# Altium PCB QuadDeckV2.PcbDoc
Units mm, origin at the board's own origin, x right, y up, seen from the top; angles counter-clockwise.
Board outline 42.2 x 31.8 mm, 4 copper layers (Top Layer, VDD, GND, Bottom Layer), stack 0.604 mm thick; 21 components, 13 nets, 108 pads, 41 vias.
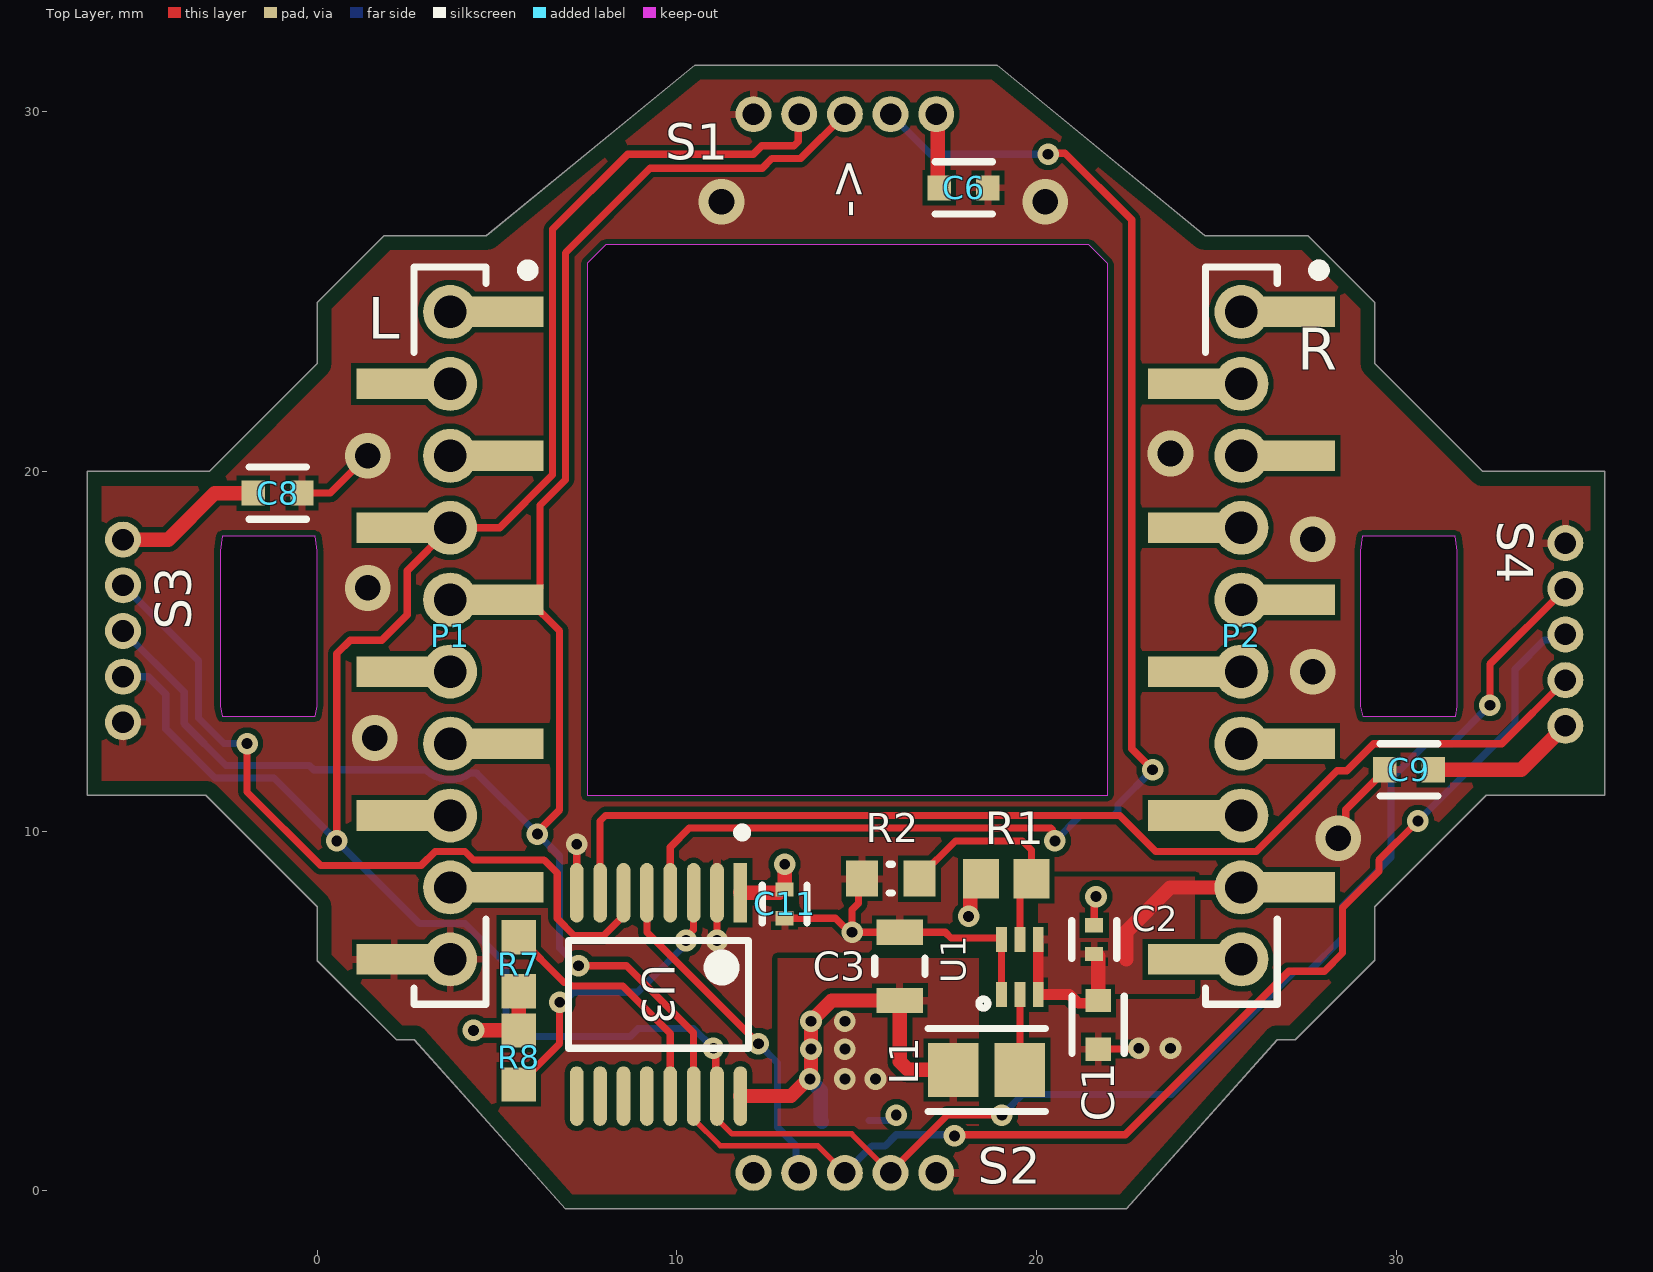
[diagram p0: Top Layer view]
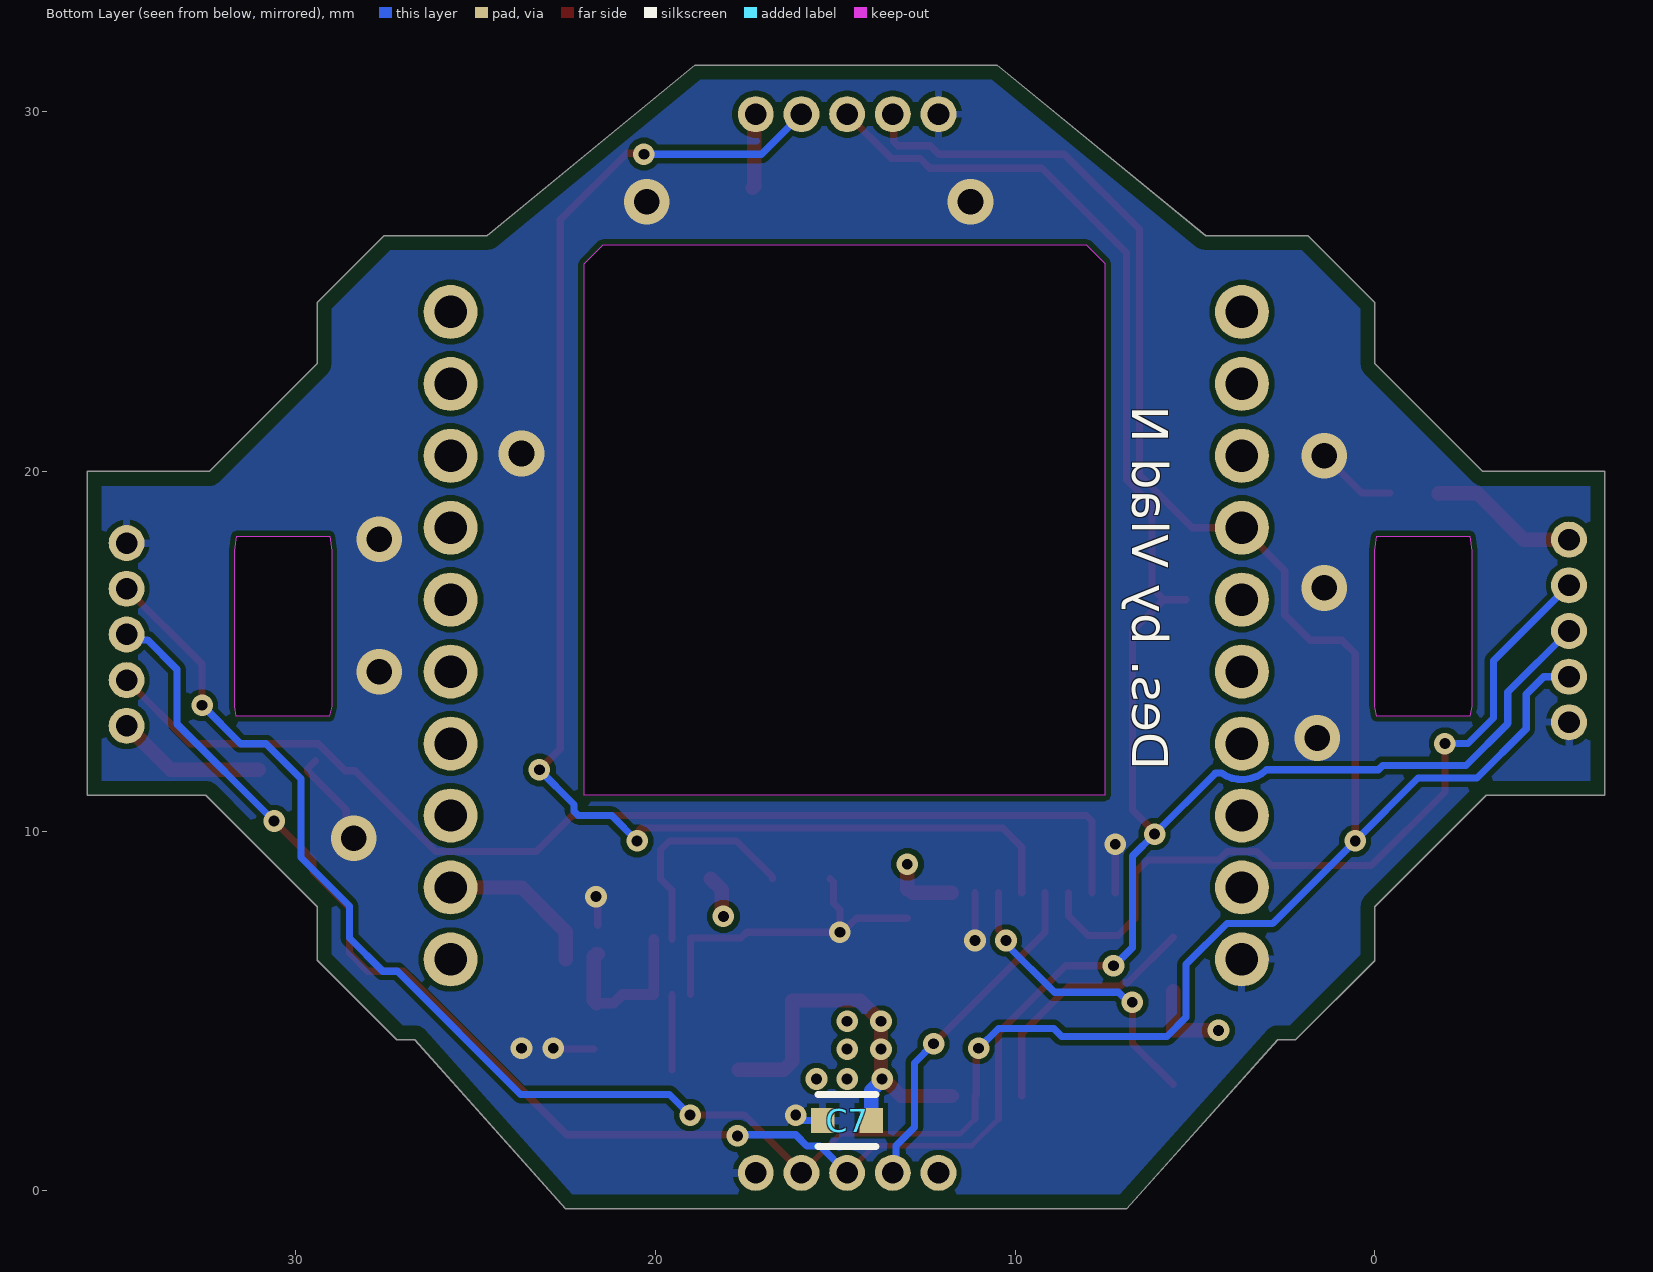
[diagram p1: Bottom Layer view, seen from below]
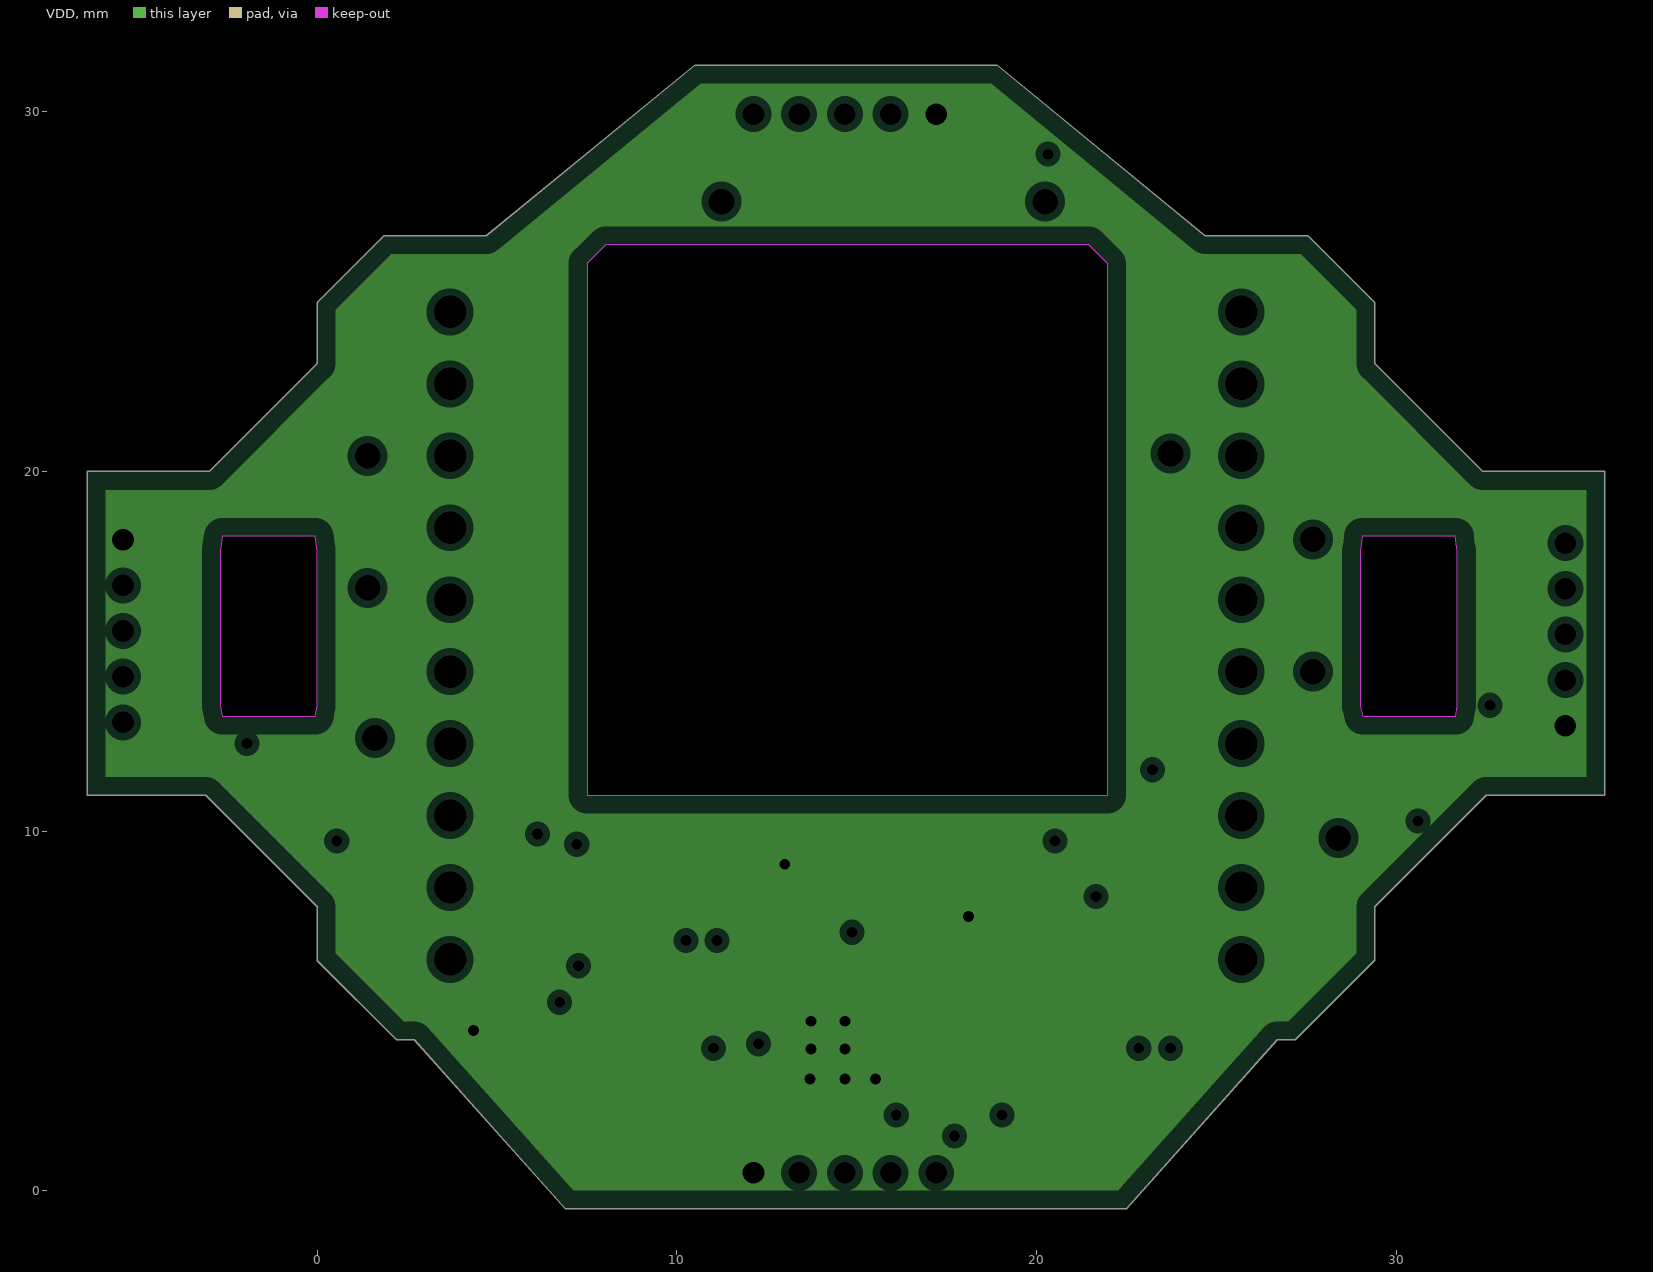
[diagram p2: VDD, clearances drawn from the general rule]
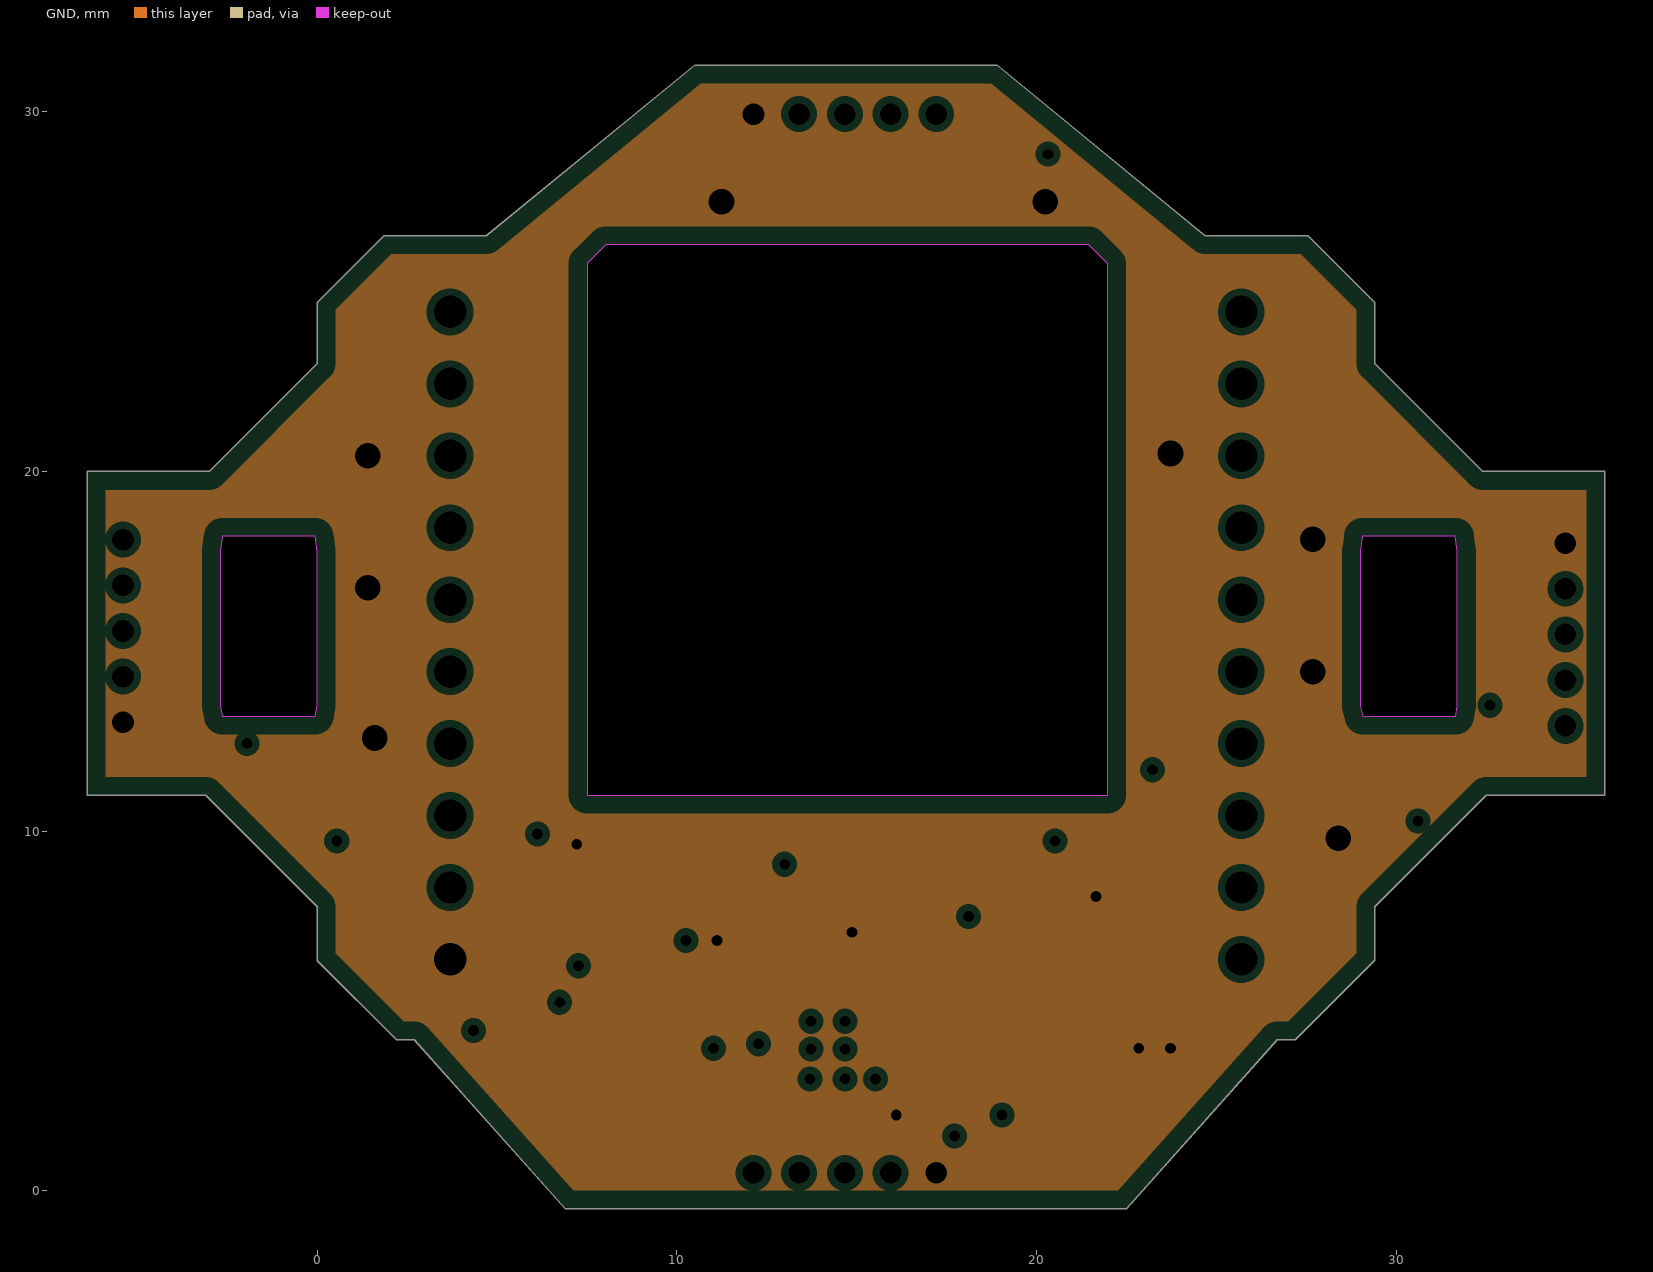
[diagram p3: GND, clearances drawn from the general rule]
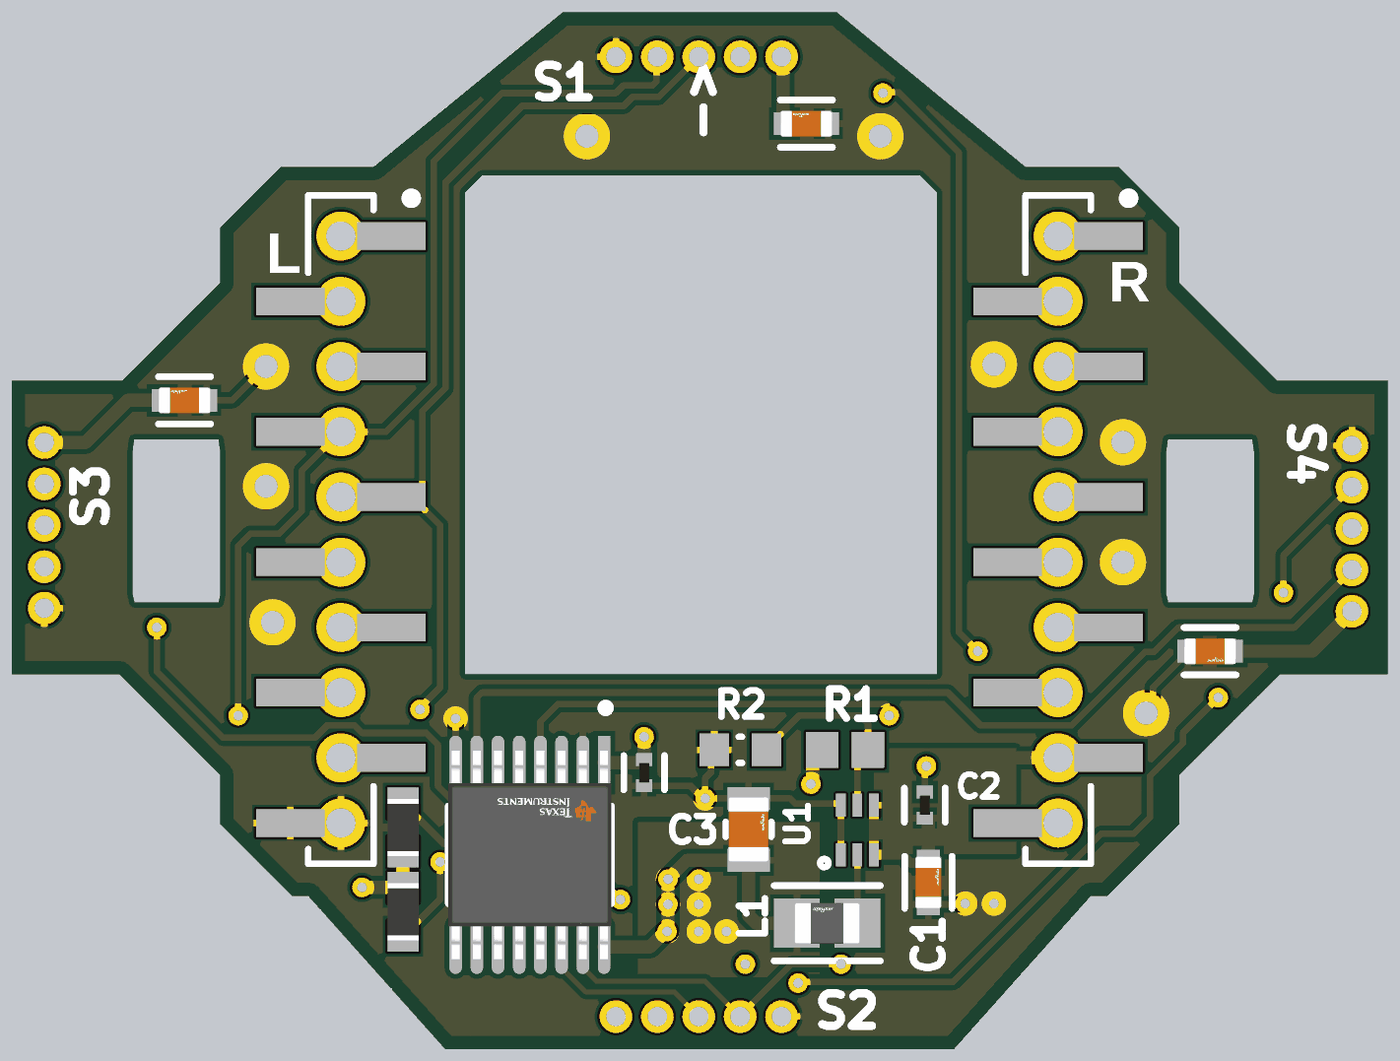
[diagram p4: 3D render of the assembled board from above, using the file's embedded part models]

## Layer stack, top to bottom
Top Solder: solder mask 0.01, Solder Resist, Dk 3.5
Top Layer: signal copper 0.036
Dielectric 2: prepreg 0.0711, PP-006, Dk 4.1
VDD: plane copper 0.035, net VDD
Dielectric 3: prepreg 0.0711, PP-006, Dk 4.1
GND: plane copper 0.035, net GND
Dielectric 1: prepreg 0.32, FR-4, Dk 4.1
Bottom Layer: signal copper 0.036
Bottom Solder: solder mask 0.01, Solder Resist, Dk 3.5

## Board outline
29.4,23 32.4,20 35.8,20 35.8,11 32.5,11 29.4,7.9 29.4,6.41 27.19,4.2 26.69,4.2 22.49,-0.5 6.9,-0.5 2.7,4.2 2.2,4.2 0,6.4 0,7.9 -3.1,11 -6.4,11 -6.4,20 -3,20 0,23 0,24.7 1.856,26.556 4.7,26.556 10.5,31.3 18.9,31.3 24.684,26.556 27.544,26.556 29.4,24.7
cut-out: 29,17.8 29,13.475 29.065,13.2 31.647,13.2 31.7,13.475 31.7,17.8 31.644,18.2 29.056,18.2
cut-out: -2.7,17.8 -2.7,13.475 -2.635,13.2 -0.053,13.2 0,13.475 0,17.8 -0.056,18.2 -2.644,18.2
cut-out: 7.5,25.784 7.5,11 21.976,11 21.976,25.779 21.455,26.3 8.016,26.3

## Design rules (kind name [scope] priority, off if disabled: settings)
AcuteAngle [All] p1: minimum=6.00000000000000E+0001 checktracksonly=TRUE
BoardOutlineClearance [All] p1: gap=0 ignorepadtopadclearanceinfootprint=FALSE except(0.4: Poly-OutlineEdge)
Clearance [All] p1: gap=0.15 ignorepadtopadclearanceinfootprint=FALSE
ComponentClearance ComponentClearance_moreweirdtphole [InComponent('TP27') vs InComponent('U2')] p1: gap=0 collisioncheckmode=3 verticalgap=0 showdistances=FALSE
ComponentClearance ComponentClearance_weird_tp_holes [InComponent('TP25') vs InComponent('TP26')] p2: gap=0 collisioncheckmode=3 verticalgap=0 showdistances=FALSE
ComponentClearance ComponentClearance_TPunderlatch [InComponent('U2') vs InComponent('TP23') or InComponent('JP21') or InComponent('JP27') or InComponent('JP24') or InComponent('JP25') or InComponent('JP26')] p3: gap=0 collisioncheckmode=3 verticalgap=0 showdistances=FALSE
ComponentClearance ComponentClearance_NetTie [InComponentClass('NetTie')] p4: gap=0 collisioncheckmode=3 verticalgap=0 showdistances=TRUE
ComponentClearance ComponentClearance_Hole [InComponentClass('Holes, Screws etc.')] p5: gap=0 collisioncheckmode=3 verticalgap=0 showdistances=TRUE
ComponentClearance [All] p6: gap=0.152 collisioncheckmode=3 verticalgap=0.152 showdistances=TRUE
DiffPairsRouting [All] p1: maxlimit=0.381 minlimit=0.125 mostfreqgap=0.125 toplayer_minwidth=0.125 toplayer_maxwidth=0.381 toplayer_prefwidth=0.3 bottomlayer_minwidth=0.125 bottomlayer_maxwidth=0.381 bottomlayer_prefwidth=0.3 maxuncoupledlength=12.7
FabricationTestpoint [All] p1: side=3 testpointundercomponent=TRUE minsize=0.5 maxsize=2.54 preferedsize=1.524 minholesize=0 maxholesize=1.016 preferedholesize=0.813 testpointgrid=0.025 allowsidetop=TRUE allowsidebottom=TRUE usegrid=TRUE gridtolerance=0
FanoutControl Fanout_BGA_1 [InComponent('U1')] p1: bgadir=Out bgaviamode=Centered fanoutstyle=BGA fanoutdirection=Alternating viagrid=0.025 // Fanout_BGA (Default Rule)
FanoutControl Fanout_BGA [IsBGA] p2: bgadir=Out bgaviamode=Centered fanoutstyle=Auto fanoutdirection=Alternating viagrid=0.025 // Fanout_BGA (Default Rule)
FanoutControl Fanout_LCC [IsLCC] p3: bgadir=Out bgaviamode=Centered fanoutstyle=Auto fanoutdirection=Alternating viagrid=0.025 // Fanout_LCC (Default Rule)
FanoutControl Fanout_SOIC [IsSOIC] p4: bgadir=Out bgaviamode=Centered fanoutstyle=Auto fanoutdirection=Alternating viagrid=0.025 // Fanout_SOIC (Default Rule)
FanoutControl Fanout_Small [(CompPinCount < 5)] p5: bgadir=Out bgaviamode=Centered fanoutstyle=Auto fanoutdirection=OutThenIn viagrid=0.025 // Fanout_Small (Default Rule)
FanoutControl Fanout_Default [All] p6: bgadir=Out bgaviamode=Centered fanoutstyle=Auto fanoutdirection=Alternating viagrid=0.025 // Fanout_Default (Default Rule)
Height [All] p1: minheight=0 maxheight=50 prefheight=12.7
HoleSize [All] p1: absolutevalues=TRUE maxlimit=5 minlimit=0.3 maxpercent=80.000 minpercent=20.000
HoleToHoleClearance [All] p1: gap=0.25 allowstackedmicrovias=FALSE
Length "InNet('CLK_0') Or InNet('CLK_1')" [InNet('CLK_0') Or InNet('CLK_1')] p1: maxlimit=36.773 minlimit=0
MinimumAnnularRing MinimumAnnularRing_Vias_bga [Isvia and TouchesRoom('GAP')] p1: minimumring=0.1
MinimumAnnularRing MinimumAnnularRing_Vias [Isvia] p2: minimumring=0.124
MinimumAnnularRing [All] p3: minimumring=0.15
MinimumSolderMaskSliver [All] p1: minsoldermaskwidth=0.1
PlaneClearance "Mounting Holes" [InPadClass('ExtendedClearance')] p1: clearance=2.1
PlaneClearance [All] p2: clearance=0.2
PlaneConnect [All] p1: planeconnectstyle=Direct reliefexpansion=0.508 reliefentries=4 reliefconductorwidth=0.254 reliefairgap=0.254
PolygonConnect [All] p1: thpad.connectstyle=Relief thpad.reliefconductorwidth=0.2 thpad.reliefentries=4 thpad.polygonreliefangle="90 Angle" thpad.airgapwidth=0.15 smdpad.connectstyle=Relief smdpad.reliefconductorwidth=0.2 smdpad.reliefentries=4 smdpad.polygonreliefangle="90 Angle" smdpad.airgapwidth=0.125 via.connectstyle=Direct via.reliefconductorwidth=0.2 via.reliefentries=4 via.polygonreliefangle="45 Angle" via.airgapwidth=0.125
RoutingVias [All] p1: holewidth=0.3 width=0.6 viastyle="Through Hole" minholewidth=0.3 minwidth=0.6 maxholewidth=0.3 maxwidth=0.6
ShortCircuit ShortCircuit_variant_footprint [IsPad and not InAnyNet vs IsPad and not InAnyNet] p1: allowed=TRUE
ShortCircuit [All] p2: allowed=FALSE
SilkToSilkClearance "SilkText Exception" [OnSilkscreen  And (IsText And Not IsDesignator) vs OnSilkscreen  And ((IsText And Not IsDesignator) or IsTrack)] p1: silktosilkclearance=0
SilkToSilkClearance [All] p2: silktosilkclearance=0.01
SilkToSolderMaskClearance [IsPad] p1: minsilkscreentomaskgap=0.01 clearancetoexposedcopper=TRUE
SolderMaskExpansion [All] p1: expansion=0.075 istentingtop=FALSE
Width Width_2 [InNet('VCOM')] p1: maxlimit=0.4 minlimit=0.3 preferedwidth=0.4
Width Width_1 [InNet('VDD')] p2: maxlimit=0.4 minlimit=0.4 preferedwidth=0.4
Width [All] p3: maxlimit=0.2 minlimit=0.15 preferedwidth=0.2
13 further rules are at their usual default settings.

## Components (designator, comment, footprint, x,y, rotation, side; value= is the part's Value field where it differs from the comment)
C1 "4.7uF" FP-GRM188-0_1-MFG 21.712,4.617 r90 top
C2 "100nF" FP-GRM15-MFG 21.601,6.986 r270 top value=0.10μF
C3 "22uF" FP-GRM21B-0_15-MFG 16.197,6.242 r90 top
C6 "4.7uF" FP-GRM188-0_1-MFG 17.971,27.885 r180 top
C7 "4.7uF" FP-GRM188-0_1-MFG 14.669,1.956 r180 bottom
C8 "4.7uF" FP-GRM188-0_1-MFG -1.1,19.4 r180 top
C9 "4.7uF" FP-GRM188-0_1-MFG 30.35,11.706 r0 top
C11 "100nF" FP-GRM15-MFG 12.995,7.98 r90 top value=0.10μF
L1 "1uH 1.6A" FP-LQM21PN_EH-w1_5-IPC_A 18.609,3.363 r180 top
P1 "L" PCBComponent_1 3.596,14.104 r0 top locked
P2 "R" PCBComponent_1 25.592,14.104 r0 top locked
R1 "100k" RESC1608X55X30ML20T20 19.158,8.68 r180 top
R2 "24k" RESC0603(1608)_N 15.944,8.68 r0 top value="24000.00 Ohm"
R7 "47K" RESC1608X55X30NL15T15 5.6,6.3 r270 top
R8 "47K" RESC1608X55X30NL15T15 5.6,3.712 r90 top
S1 "Component_1" tof-connector 12.51,29.935 r180 top
S2 "Component_1" tof-connector 16.828,0.5 r0 top
S3 "Component_1" tof-connector -5.4,13.407 r270 top
S4 "Component_1" tof-connector 34.7,17.629 r90 top
U1 "TPS62A0x" SOT50P245X110-6N 19.535,6.224 r90 top
U3 "TCA6408AQPWRQ1" FP-PW0016A-IPC_B 9.489,5.462 r270 top

## Footprints (in the part's own frame and the unit in brackets; to place one, negate y for a bottom-side part, rotate by r counter-clockwise, add the part's x,y. Pads: shape width x height; smd on the part's side, far side on the other; paste and mask are expansions set on the pad)
FP-GRM15-MFG [mm]
  rect 0.4x0.5 smd paste+0 mask+0: 1(-0.4,0) 2(0.4,0)
  silkscreen extent -0.53,-0.63 0.53,0.63, body extent -0.7,-0.38 0.7,0.38, height 0.25
FP-GRM21B-0_15-MFG [mm]
  rect 0.7x1.3 smd paste+0 mask+0: 1(-0.95,0) 2(0.95,0)
  silkscreen extent -0.23,-0.7 0.23,0.7, body extent -1.4,-0.8 1.4,0.8, height 0.25
FP-GRM188-0_1-MFG [mm]
  rect 0.65x0.7 smd paste+0 mask+0: 1(-0.675,0) 2(0.675,0)
  silkscreen extent -0.8,-0.72 0.8,0.72, body extent -1.1,-0.55 1.1,0.55, height 0.25
FP-LQM21PN_EH-w1_5-IPC_A [mm]
  rect 1.406x1.508 smd paste+0 mask+0: 1(-0.926,0) 2(0.926,0)
  silkscreen extent -1.63,-1.15 1.63,1.15, body extent -2.13,-1.25 2.13,1.25, height 0.25
FP-PW0016A-IPC_B [mm]
  rect 1.655x0.381 smd paste+0 mask+0: 1(-2.825,2.275)
  rrect100% 1.655x0.381 smd paste+0 mask+0: 2(-2.825,1.625) 3(-2.825,0.975) 4(-2.825,0.325) 5(-2.825,-0.325) 6(-2.825,-0.975) 7(-2.825,-1.625) 8(-2.825,-2.275) 9(2.825,-2.275) 10(2.825,-1.625) 11(2.825,-0.975) 12(2.825,-0.325) 13(2.825,0.325) 14(2.825,0.975) 15(2.825,1.625) 16(2.825,2.275)
  silkscreen extent -4.63,-2.5 1.5,2.5, body extent -3.9,-2.75 3.9,2.75, height 0.25
PCBComponent_1 [mm]
  round 1.5 hole 0.9: 1(0.098,10.332) 2(0.098,8.332) 3(0.098,6.332) 4(0.098,4.332) 5(0.098,2.332) 6(0.098,0.332) 7(0.098,-1.668) 8(0.098,-3.668) 9(0.098,-5.668) 10(0.098,-7.668)
  rect 2.1x0.85 smd: 1(1.648,10.332) 2(-1.452,8.332) 3(1.648,6.332) 4(-1.452,4.332) 5(1.648,2.332) 6(-1.452,0.332) 7(1.648,-1.668) 8(-1.452,-3.668) 9(1.648,-5.668) 10(-1.452,-7.668)
  silkscreen extent -0.9,-8.92 2.41,11.64, body extent -0.9,-8.92 1.1,11.58, height 3
RESC0603(1608)_N [mm] "Chip Resistor, Body 1.6x0.8mm, IPC Medium Density"
  rect 0.9x1 smd: 1(-0.8,0) 2(0.8,0)
  silkscreen extent -0.05,-0.4 0.05,0.4, body extent -0.85,-0.47 0.85,0.47, height 0.6
RESC1608X55X30ML20T20 [mm] "Chip Resistor, 2-Leads, Body 1.60x0.80mm, IPC Low Density"
  rect 1x1.1 smd: 1(-0.7,0) 2(0.7,0)
  body extent -0.9,-0.5 0.9,0.5, height 0.55
RESC1608X55X30NL15T15 [mm] "Chip Resistor, 2-Leads, Body 1.75x0.95mm, IPC Medium Density"
  rect 0.95x0.95 smd: 1(-0.75,0) 2(0.75,0)
  body extent -0.87,-0.48 0.87,0.48, height 0.55
SOT50P245X110-6N [mm] "SOT23, 6-Leads, Body 1.80x2.45mm, Pitch 0.50mm, IPC Medium Density"
  rect 0.7x0.3 smd: 1(-0.762,0.508) 2(-0.762,0) 3(-0.762,-0.508) 4(0.762,-0.508) 5(0.762,0) 6(0.762,0.508)
  silkscreen extent -1.14,0.89 -0.89,1.14, body extent -0.74,-0.9 0.74,0.9, height 1.1
tof-connector [mm]
  round 1 hole 0.6: 1(-4.699,0) 2(-3.429,0) 3(-2.159,0) 4(-0.889,0) 5(0.381,0)

## Part data
C1 C6 C7 C8 C9: library part CMP-2006-02799-3, "CAP CER 4.7UF 6.3V X5R 0603", Case Code (Imperial)=0603, Case Code (Metric)=1608, Dielectric=X5R, Max Operating Temperature=85°C, Min Operating Temperature=-55°C, Package Quantity=1, Tolerance=10%, Voltage=6.3V, Capacitance=4.7uF, Case/Package=0603, Depth=0.8mm, Height=0.8mm, Lead Free="Lead Free", Length=1.6mm, Material=Ceramic, Mount="Surface Mount", Packaging="Tape and Reel", Radiation Hardening=No, REACH SVHC="No SVHC", RoHS Compliant=Yes, Termination=SMD/SMT, Thickness=0.035inch, Voltage Rating=6.3V, Voltage Rating (DC)=6.3V, Width=0.8mm
C2 C11: library part CMP-2100-03641-2, "CAP CER 0.1UF 16V X7R 0402", Capacitance=0.10μF, Manufacturer=Murata, Manufacturer Part Number=GRM155R71C104KA88D, Package=GRM15, Temperature="-55°C to +125°C", Temperature Characteristic=X7R, Temperature Range High=+125°C, Temperature Range Low=-55°C, Tolerance=10%, Voltage Rating=16Vdc, Category=Cap, ComponentLink2Description=Datasheet, ComponentLink2URL=https://search.murata.co.jp/Ceramy/image/img/A01X/G101/ENG/GRM155R71H471KA01-01A.pdf, Device Class L1="Passive Components", Device Class L2=Capacitors, Device Class L3="Ceramic Capacitors", Digikey Description="CAP CER 0.1UF 16V X7R 0402", Height=0.55mm, Ipc Land Pattern Name=CAPC10050X219, Lead Free=yes, Material=Ceramic, Mouser Description="0402 0.1 uF 16V ±10 % Tolerance X7R SMT Multilayer Ceramic Capacitor", Octopart=https://octopart.com/grm155r71c104ka88d-murata-196880, RoHS=TRUE, Standoff Height=0mm
C3: library part CMP-2007-03385-2, "Chip Multilayer Ceramic Capacitors for General Purpose, 0805, 22uF, X5R, 15%, 20%, 6.3V", Case Code (Imperial)=0805, Case Code (Metric)=2012, Dielectric=X5R, Max Operating Temperature=85°C, Min Operating Temperature=-55°C, Package Quantity=1, Tolerance=20%, Voltage=6.3V, Capacitance=22uF, Case/Package=0805, Depth=1.25mm, Height=1.25mm, Lead Free="Lead Free", Length=2mm, Material=Ceramic, Mount="Surface Mount", Packaging="Tape and Reel", Radiation Hardening=No, REACH SVHC="No SVHC", Termination=SMD/SMT, Thickness=0.053inch, Voltage Rating=6.3V, Voltage Rating (DC)=6.3V, Width=0.049inch
L1: library part CMP-06042-012339-2, "FIXED IND 1UH 1.6A 107 MOHM SMD", Case Code (Imperial)=0805, Case Code (Metric)=2012, Current Rating=1.6A, DC Resistance (DCR)=107mR, Inductance=1uH, Max Operating Temperature=85°C, Min Operating Temperature=-40°C, Saturation Current=1A, Self Resonant Frequency=50MHz, Test Frequency=1MHz, Tolerance=20%, Case/Package=0805, Core Material=Ferrite, Mount="Surface Mount", Packaging="Tape and Reel", RoHS Compliant=Yes, Shielding=Shielded
P1 P2: library part MHDR1X10, "Header, 10-Pin", LatestRevisionDate=17-Jul-2002, LatestRevisionNote="Re-released for DXP Platform.", Publisher="Altium Limited"
R1: library part CMP-2000-00875-1, Manufacturer=Panasonic, Part Number=ERA3AEB104V
R2: library part CMP-1012-00107-1, "24K 0.1W 5% 0603 (1608 Metric)  SMD", Case-EIA=0603, Case-Metric=1608, Power="0.1 W", Tolerance="5 %", Technology=SMT
R7 R8: library part CMP-2000-00523-2, "Chip Resistor, 47 KOhm, +/- 1%, 0.1 W, -55 to 155 degC, 0603 (1608 Metric), RoHS, Tape and Reel", Case Code (Imperial)=0603, Case Code (Metric)=1608, Colour=Red, Forward Current="20 mA", Forward Voltage="2.1 V", Max Operating Temperature="100 degC", Min Operating Temperature="-40 degC", Package Quantity=3000, Power Rating="90 mW", Case\Package=0603, ComponentLink1Description="Manufacturer URL", ComponentLink1URL=http://www.panasonic.com/, ComponentLink2Description=Datasheet, ComponentLink2URL=http://industrial.panasonic.com/cdbs/www-data/pdf/RDA0000/AOA0000C86.pdf, DatasheetVersion=Apr-15, Height="0.6 mm", Illumination Colour=Red, Length="1.6 mm", Lens Style=Clear, Luminous Intensity="63 mcd", Mount="Surface Mount", Nominal Vf="2.1 V", Nominal Wavelength="639 nm", PackageDescription="2-Pin Surface Mount Device, Body 1.6 x 0.85 mm", PackageReference=0603, Packaging="Tape and Reel", Pins=2, Radiation Hardening=No, REACH SVHC="No SVHC", RoHSCompliant=true, Viewing Angle="160 degrees", Width="0.8 mm"
U1: library part TPS62A01
U3: library part CMP-04886-000007-1, "IC I/O EXPANDER I2C 8B 16TSSOP", Case/Package=TSSOP, Max Operating Temperature=125°C, Min Operating Temperature=-40°C, Lead Free="Lead Free", Number of I/Os=8, RoHS Compliant=Yes

## Via types
v1: diameter 0.6, hole 0.3, Top Layer to Bottom Layer, 32 vias
v2: diameter 1.27, hole 0.711, Top Layer to Bottom Layer, 9 vias

## Nets (pads, with @x,y where several pads share a name; then routed paths per layer and width w, separated by ;. In a path a pad name is that pad's centre, name@x,y a point inside that pad or via, vN(x,y) a via of type N, cw(c..) or ccw(c..) an arc to the next point about the centre after c; other vN are vias at no path point)
\INT: R7.1 U3.13 | length 7.1
  Top Layer w0.2: R7.1 6.856,5.794 6.967,5.794 7.065,5.696 8.495,5.696 9.814,4.377 U3.13
\RESET: R8.1 U3.3 | length 8.4
  Top Layer w0.2: R8.1 6.739,4.101 v1(6.739,5.244) ; v1(10.251,6.96) 10.251,7.049 10.464,7.262 U3.3
  Bottom Layer w0.2: v1(6.739,5.244) 6.847,5.244 7.125,5.521 8.906,5.521 10.251,6.866 v1(10.251,6.96)
GND: C1.1 C2.1 C3.2 C6.1 C7.1 C8.1 C9.1 C11.1 P1.10 R2.1 S1.5 S2.5 S3.5 S4.5 U1.1 U1.6 U3.2 U3.8 | length 19.9
  Top Layer w0.2: C8.1 0.364,19.4 v2(1.4,20.436) ; U3.8 v1(7.214,9.639) ; v1(11.114,6.96) U3.2 ; C11.1 14.409,7.58 14.798,7.192 v1(14.869,7.192) ; R2.1 15.05,8.586 15.05,7.998 14.869,7.816 v1(14.869,7.192) ; U1.1 19.027,7.03 17.622,7.03 17.461,7.192 C3.2 v1(14.869,7.192) ; C2.1 21.601,8.133 v1(21.651,8.183) ; C1.1 22.816,3.942 v1(22.841,3.966) ; v2(28.388,9.807) 28.593,10.012 28.593,10.598 29.675,11.681 C9.1 29.675,11.731 C9.1@29.45,11.956
  Bottom Layer w0.2: C7.1 15.944,1.956 v1(16.097,2.108)
  other v1: 23.721,3.966
  other v2: 1.6,12.591 27.677,14.436 1.4,16.763 27.677,18.114 23.721,20.5 11.239,27.5 20.238,27.5
LPn_0: S1.2 U3.4 | length 39.6
  Top Layer w0.2: U3.4 9.814,9.555 10.345,10.086 20.391,10.086 20.432,10.046 20.432,9.807 v1(20.508,9.73) ; v1(20.318,28.822) 20.343,28.848 20.791,28.848 22.642,26.997 22.642,12.289 v1(23.225,11.706)
  Bottom Layer w0.2: S1.2 17.051,28.822 v1(20.318,28.822) ; v1(20.508,9.73) 21.214,10.436 22.144,10.436 22.261,10.553 22.261,10.742 v1(23.225,11.706)
LPn_1: S2.2 U3.5 | length 9.5
  Top Layer w0.2: U3.5 9.164,7.192 v1(12.266,4.089)
  Bottom Layer w0.2: v1(12.266,4.089) 12.799,3.557 12.799,1.767 13.306,1.259 13.306,0.593 S2.2
LPn_2: S3.2 U3.6 | length 21.6
  Top Layer w0.2: v1(-1.95,12.436) -1.95,11.089 0.088,9.051 2.894,9.051 3.28,9.436 4.108,9.436 4.344,9.2 6.308,9.2 6.67,8.839 6.67,7.572 7.142,7.1 7.963,7.1 8.514,7.651 U3.6
  Bottom Layer w0.2: S3.2 -3.3,14.736 -3.3,13.143 -2.593,12.436 v1(-1.95,12.436)
LPn_3: S4.2 U3.7 | length 31.3
  Top Layer w0.2: U3.7 7.864,10.284 8.016,10.436 22.312,10.436 23.312,9.436 25.276,9.436 26.105,9.436 28.349,11.681 28.621,11.681 29.371,12.431 32.931,12.431 S4.2
NetL1_1: L1.1 U1.2 | length 2.1
  Top Layer w0.2: L1.1 U1.2
NetR1_1: R1.1 R2.2 U1.5 | length 6.3
  Top Layer w0.2: R2.2 16.744,8.73 17.744,9.73 19.609,9.73 19.858,9.481 R1.1 19.535,8.357 U1.5
SCL: P1.5 S1.3 S2.3 S3.3 S4.3 U3.14 | length 85.2
  Top Layer w0.15: U3.14@10.464,2 11.204,1.259 13.91,1.259 S2.3
  Top Layer w0.2: P1.5@5.244,16.436 P1.5@5.869,16.436 ; v1(6.122,9.919) 6.103,9.9 6.045,9.9 6.739,10.594 6.739,15.566 P1.5@5.869,16.436 ; v1(7.264,6.257) 7.268,6.261 8.598,6.261 10.464,4.396 U3.14 U3.14@10.464,2 ; S1.3 13.44,28.706 12.645,28.706 12.37,28.431 9.252,28.431 6.9,26.078 6.9,19.769 6.194,19.063 6.194,16.761 P1.5@5.869,16.436 ; v1@17.716,1.558 22.464,1.558 27.01,6.104 27.999,6.104 28.505,6.61 28.505,7.872 29.514,8.881 29.514,9.198 v1(30.6,10.284)
  Bottom Layer w0.2: S3.3 -3.7,13.866 -3.7,12.99 -2.537,11.828 -0.219,11.828 -0.097,11.706 3.011,11.706 ccw(c3.694,12.436) 4.275,11.622 4.335,11.622 4.418,11.622 4.477,11.563 v1(6.122,9.919) 6.739,9.301 6.739,6.76 7.242,6.257 v1(7.264,6.257) ; S2.3 15.419,1.25 15.788,1.25 16.097,1.558 17.685,1.558 v1(17.716,1.527) ; v1(30.6,10.284) 33.303,12.987 33.303,14.503 34.119,15.319 34.549,15.319 S4.3
SDA: P1.4 S1.4 S2.4 S3.4 S4.4 U3.15 | length 87.2
  Top Layer w0.15: U3.15@11.114,2 11.529,1.584 14.855,1.584 S2.4
  Top Layer w0.2: v1(0.544,9.73) 0.544,14.937 0.918,15.311 1.794,15.311 2.5,16.017 2.5,17.242 3.694,18.436 5.073,18.436 6.544,19.908 6.544,26.733 8.633,28.822 12.122,28.822 12.355,29.056 13.253,29.056 13.37,29.173 13.37,29.905 S1.4 ; v1(11.014,3.965) 11.079,3.899 11.079,2.672 U3.15 U3.15@11.114,2 ; S2.4 15.939,0.528 17.52,2.108 v1(19.035,2.108) ; v1(32.6,13.5) 32.6,14.64 S4.4
  Bottom Layer w0.2: S3.4 -4.7,14.296 -4.212,13.809 -4.212,12.846 -2.844,11.478 -1.203,11.478 v1(0.544,9.73) 2.839,7.436 4.108,7.436 5.244,6.3 5.244,4.824 5.777,4.292 8.702,4.292 8.926,4.515 10.464,4.515 v1(11.014,3.965) ; v1(19.035,2.108) 19.607,2.681 23.746,2.681 27.17,6.104 27.578,6.104 28.505,7.032 28.505,7.921 29.85,9.266 29.85,11.456 30.825,12.431 31.531,12.431 v1(32.6,13.5)
VCOM: C1.2 C2.2 P2.9 U1.3 U1.4 | length 9.2
  Top Layer w0.3: U1.4 U1.3 20.914,5.462 21.162,5.214 C1.2@21.634,5.214
  Top Layer w0.4: C2.2 21.651,6.586 21.712,6.526 C1.2 C1.2@21.634,5.214 ; 22.49,6.436 22.49,7.208 23.718,8.436 P2.9@25.69,8.436
VDD: C3.1 C6.2 C7.2 C8.2 C9.2 C11.2 L1.2 R1.2 R7.2 R8.2 S1.1 S2.1 S3.1 S4.1 U3.1 U3.16 | length 27.2
  Top Layer w0.4: S3.1 -4.141,18.106 -2.847,19.4 C8.2 C8.2@-1.775,19.375 ; v1(4.344,4.462) R8.2 R7.2 ; U3.16 13.17,2.637 13.643,3.11 v1(13.697,3.11) 13.727,3.14 v1(13.727,3.942) v1(13.727,4.716) 14.302,5.292 C3.1 16.197,3.597 16.431,3.363 L1.2 ; U3.1 12.852,8.288 12.945,8.38 C11.2 v1(12.995,9.08) ; S1.1@17.209,29.772 S1.1 17.253,29.891 17.253,27.928 C6.2 ; v1(18.109,7.63) 18.109,7.642 18.158,7.691 18.158,8.38 R1.2 ; C9.2 33.476,11.706 S4.1
  Bottom Layer w0.4: v1(13.697,3.11) 13.697,3.081 13.994,2.783 C7.2 C7.2@14.032,1.918
  other v1: 14.669,3.11 15.519,3.11 14.669,3.942 14.669,4.716
pads on no net: P1.1 P1.2 P1.3 P1.6 P1.7 P1.8 P1.9 P2.1 P2.2 P2.3 P2.4 P2.5 P2.6 P2.7 P2.8 P2.10 U3.9 U3.10 U3.11 U3.12

## Polygon pours and split planes (outlines as drawn)
GND on Top Layer "GND_L01_P003" (solid, pour order 3): -7.431,32.3 36.769,32.3 36.769,-1.056 36.347,-1.478 -7.431,-1.478
VDD on Top Layer "VDD_L01_P001" (solid, pour order 1): 18.385,6.467 18.385,1.712 12.797,1.712 12.797,6.467
VCOM on Top Layer "VCOM_L01_P000" (solid, pour order 0): 20.043,5.484 20.043,6.724 20.043,8.73 24.4,8.73 24.4,5.484 23.721,5.484 22.729,5.484
GND on Bottom Layer "GND_L04_P002" (solid, pour order 2): -7.587,32.511 36.769,32.511 36.769,-1.267 -7.709,-1.267 -7.587,-1.145
GND on GND (split plane): 24.361,26.161 24.381,26.147 24.401,26.132 24.423,26.12 24.444,26.106 24.467,26.096 24.489,26.084 24.513,26.077 24.536,26.068 24.561,26.063 24.585,26.055 24.61,26.053 24.634,26.048 24.659,26.048 24.684,26.046 27.333,26.046 28.89,24.489 28.89,23 28.899,22.9 28.928,22.805 28.976,22.716 29.039,22.639 32.039,19.639 32.116,19.576 32.205,19.528 32.3,19.499 32.4,19.49 35.29,19.49 35.29,11.51 32.5,11.51 32.4,11.501 32.305,11.472 32.216,11.424 32.139,11.361 29.039,8.261 28.976,8.184 28.928,8.095 28.899,8 28.89,7.9 28.89,6.621 26.979,4.71 26.69,4.71 26.676,4.709 26.662,4.71 26.626,4.704 26.591,4.701 26.577,4.696 26.563,4.694 26.529,4.682 26.495,4.672 26.482,4.665 26.469,4.66 26.438,4.641 26.407,4.624 26.396,4.615 26.383,4.608 26.357,4.584 26.329,4.561 26.32,4.55 26.31,4.54 22.262,0.01 7.128,0.01 3.081,4.54 3.07,4.55 3.061,4.561 3.033,4.584 3.007,4.608 2.995,4.615 2.984,4.624 2.952,4.641 2.921,4.66 2.908,4.665 2.895,4.672 2.861,4.682 2.828,4.694 2.813,4.696 2.8,4.701 2.764,4.704 2.729,4.71 2.714,4.709 2.7,4.71 2.411,4.71 0.51,6.611 0.51,7.9 0.501,8 0.472,8.095 0.424,8.184 0.361,8.261 -2.739,11.361 -2.816,11.424 -2.905,11.472 -3,11.501 -3.1,11.51 -5.89,11.51 -5.89,19.49 -3,19.49 -2.9,19.499 -2.805,19.528 -2.716,19.576 -2.639,19.639 0.361,22.639 0.424,22.716 0.472,22.805 0.501,22.9 0.51,23 0.51,24.489 2.067,26.046 4.7,26.046 4.725,26.048 4.749,26.048 4.774,26.053 4.8,26.055 4.823,26.063 4.847,26.067 4.871,26.077 4.895,26.084 4.917,26.096 4.94,26.105 4.961,26.12 4.984,26.132 5.003,26.147 5.023,26.161 10.682,30.79 18.717,30.79
VDD on VDD (split plane): 24.361,26.161 24.381,26.147 24.401,26.132 24.423,26.12 24.444,26.106 24.467,26.096 24.489,26.084 24.513,26.077 24.536,26.068 24.561,26.063 24.585,26.055 24.61,26.053 24.634,26.048 24.659,26.048 24.684,26.046 27.333,26.046 28.89,24.489 28.89,23 28.899,22.9 28.928,22.805 28.976,22.716 29.039,22.639 32.039,19.639 32.116,19.576 32.205,19.528 32.3,19.499 32.4,19.49 35.29,19.49 35.29,11.51 32.5,11.51 32.4,11.501 32.305,11.472 32.216,11.424 32.139,11.361 29.039,8.261 28.976,8.184 28.928,8.095 28.899,8 28.89,7.9 28.89,6.621 26.979,4.71 26.69,4.71 26.676,4.709 26.662,4.71 26.626,4.704 26.591,4.701 26.577,4.696 26.563,4.694 26.529,4.682 26.495,4.672 26.482,4.665 26.469,4.66 26.438,4.641 26.407,4.624 26.396,4.615 26.383,4.608 26.357,4.584 26.329,4.561 26.32,4.55 26.31,4.54 22.262,0.01 7.128,0.01 3.081,4.54 3.07,4.55 3.061,4.561 3.033,4.584 3.007,4.608 2.995,4.615 2.984,4.624 2.952,4.641 2.921,4.66 2.908,4.665 2.895,4.672 2.861,4.682 2.828,4.694 2.813,4.696 2.8,4.701 2.764,4.704 2.729,4.71 2.714,4.709 2.7,4.71 2.411,4.71 0.51,6.611 0.51,7.9 0.501,8 0.472,8.095 0.424,8.184 0.361,8.261 -2.739,11.361 -2.816,11.424 -2.905,11.472 -3,11.501 -3.1,11.51 -5.89,11.51 -5.89,19.49 -3,19.49 -2.9,19.499 -2.805,19.528 -2.716,19.576 -2.639,19.639 0.361,22.639 0.424,22.716 0.472,22.805 0.501,22.9 0.51,23 0.51,24.489 2.067,26.046 4.7,26.046 4.725,26.048 4.749,26.048 4.774,26.053 4.8,26.055 4.823,26.063 4.847,26.067 4.871,26.077 4.895,26.084 4.917,26.096 4.94,26.105 4.961,26.12 4.984,26.132 5.003,26.147 5.023,26.161 10.682,30.79 18.717,30.79

## Silkscreen, mask and mechanical layers (free items; w line width, h text height)
Top Overlay:
  text "->" at 15.221,27.056 h1 r90
Bottom Overlay:
  text "Des. by Vlad N" at 6.739,11.7 h1 r90
Mechanical 4:
  lines w0: 0,5.089 0,7.9 -2,9.9 -6.4,9.9 -6.4,21 -2,21 0,23 0,25.661 ; 0,5.089 0.889,4.2 ; 0,5.089 0.889,4.2 ; 0,5.089 0,25.661 ; 0,25.661 0.895,26.556 ; 0,25.661 0.895,26.556 ; 0.889,4.2 2.7,4.2 ; 0.889,4.2 2.7,4.2 ; 0.895,26.556 4.7,26.556 ; 0.895,26.556 4.7,26.556 ; 2.7,4.2 6.9,-0.5 22.49,-0.5 26.69,4.2 28.511,4.2 29.4,5.089 29.4,7.9 31.4,9.9 35.8,9.9 35.8,21 31.4,21 ; 4.7,26.556 8.394,31.3 20.99,31.3 24.684,26.556 28.505,26.556 29.4,25.661 29.4,23 31.4,21 ; 31.4,21 31.4,21
Mechanical 12:
  lines w0.127: 0,5.089 0.889,4.2 2.7,4.2 ; 0,25.661 0.895,26.556 4.7,26.556